# Altium PCB RelayBoardV2.PcbDoc (part 2 of 2)
Units mil, origin at the board's own origin, x right, y up, seen from the top; angles counter-clockwise.
Board outline 3700.79 x 5244.09 mil, 2 copper layers (Top Layer, Bottom Layer); 43 components, 40 nets, 128 pads, 1778 vias.
Unrouted connection lines stored in the file: 1.
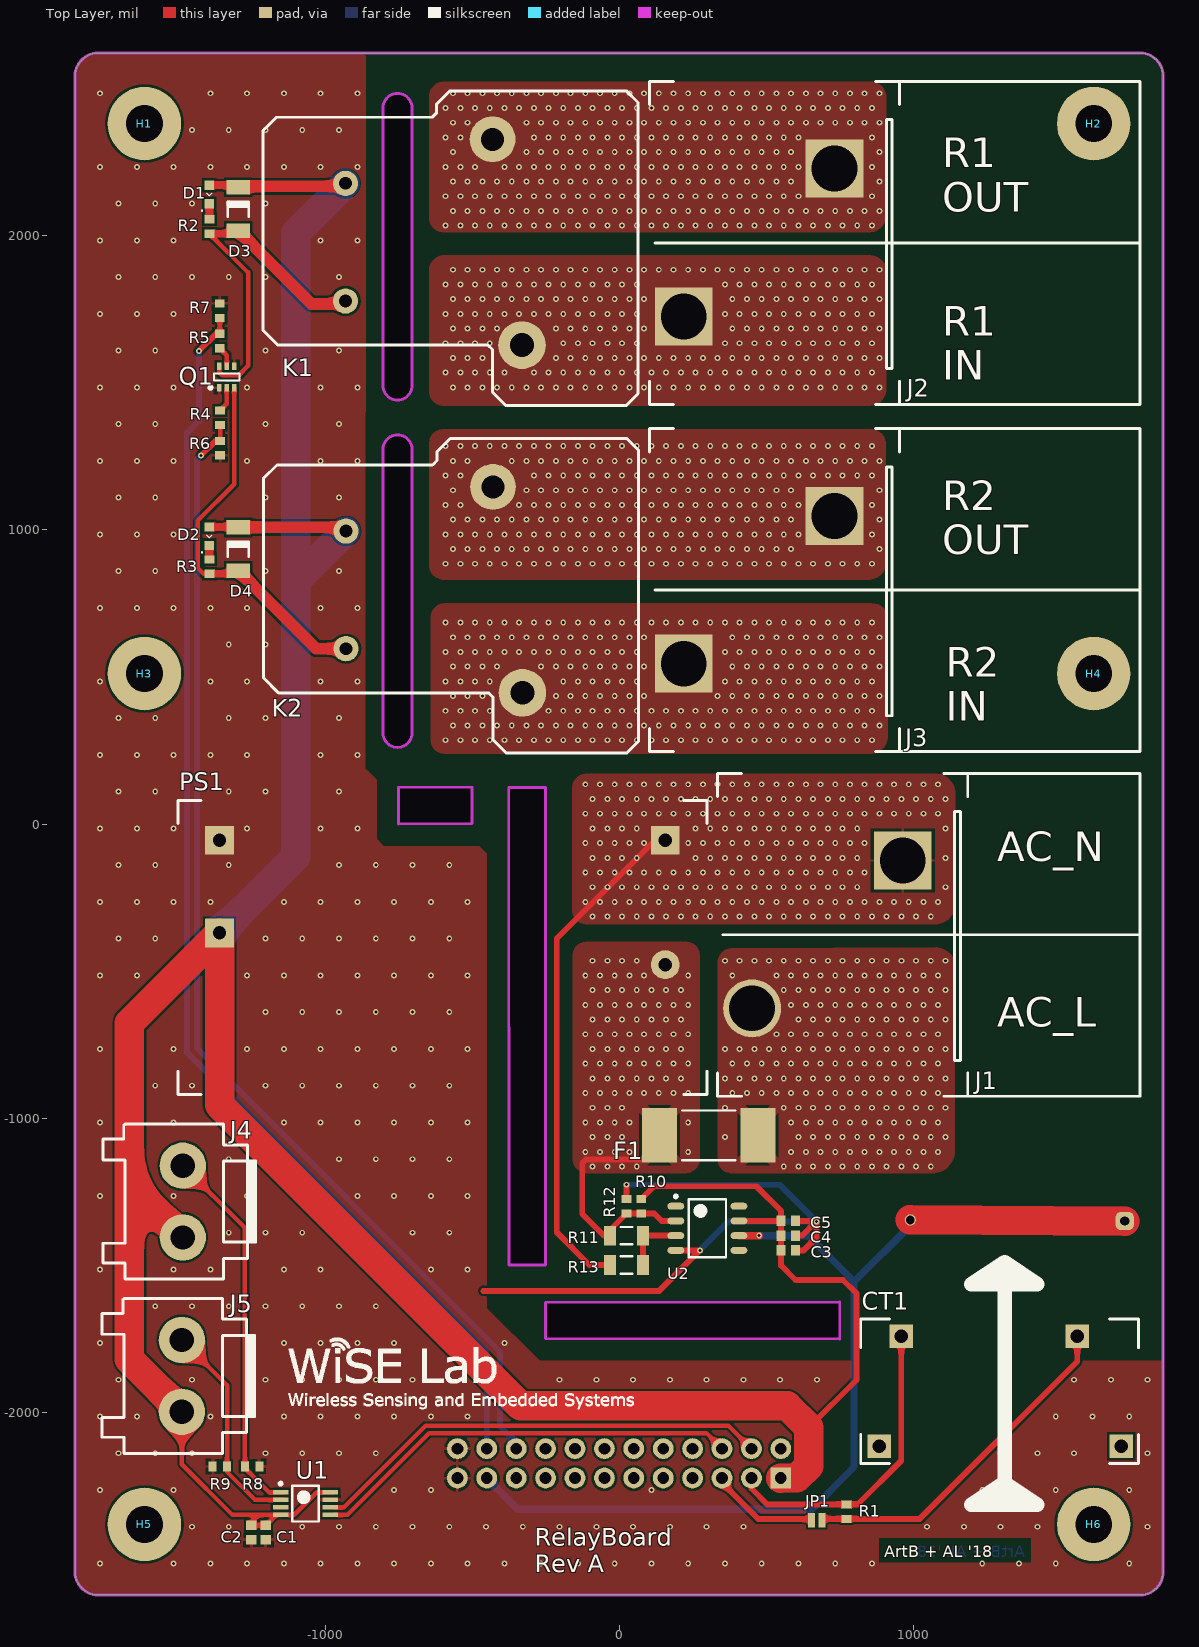
[diagram p0: Top Layer view]

## Other copper (continued)
Multi-Layer: (continued)
  lines w100 net 60HzAnt: 990.39,-1346.49 1719.62,-1350.46

## Silkscreen, mask and mechanical layers (free items; w line width, h text height)
Top Overlay:
  drawing of 3143 lines, arcs and shapes, not listed
  text "R1 / OUT" at 1099.59,2082.96 h100
  text "R1 / IN" at 1099.59,1510.94 h100
  text "R2 / OUT" at 1099.59,917.11 h100
  text "R2 / IN" at 1111.22,350.59 h100
  text "AC_N" at 1286.28,-126.52 h100
  text "AC_L" at 1286.28,-689.08 h100
  text "ArtB + AL '18" at 902.09,-2493.97 h40
  text "RelayBoard / Rev A" at -286.88,-2545.11 h60

## Text inside footprints (layer, text, board x,y; h text height)
P1: Mechanical 1 "11.37MM / FROM / CENTER" at -88,-2560.15 h39.37 r270